# Altium PCB PCB1.PcbDoc
Units mm, origin at the board's own origin, x right, y up, seen from the top; angles counter-clockwise.
Board outline 40 x 40 mm, 4 copper layers (Top Layer, Int1 (GND), Int2 (PWR), Bottom Layer), stack 1.57 mm thick; 33 components, 22 nets, 161 pads, 29 vias.
Unrouted connection lines stored in the file: 88.
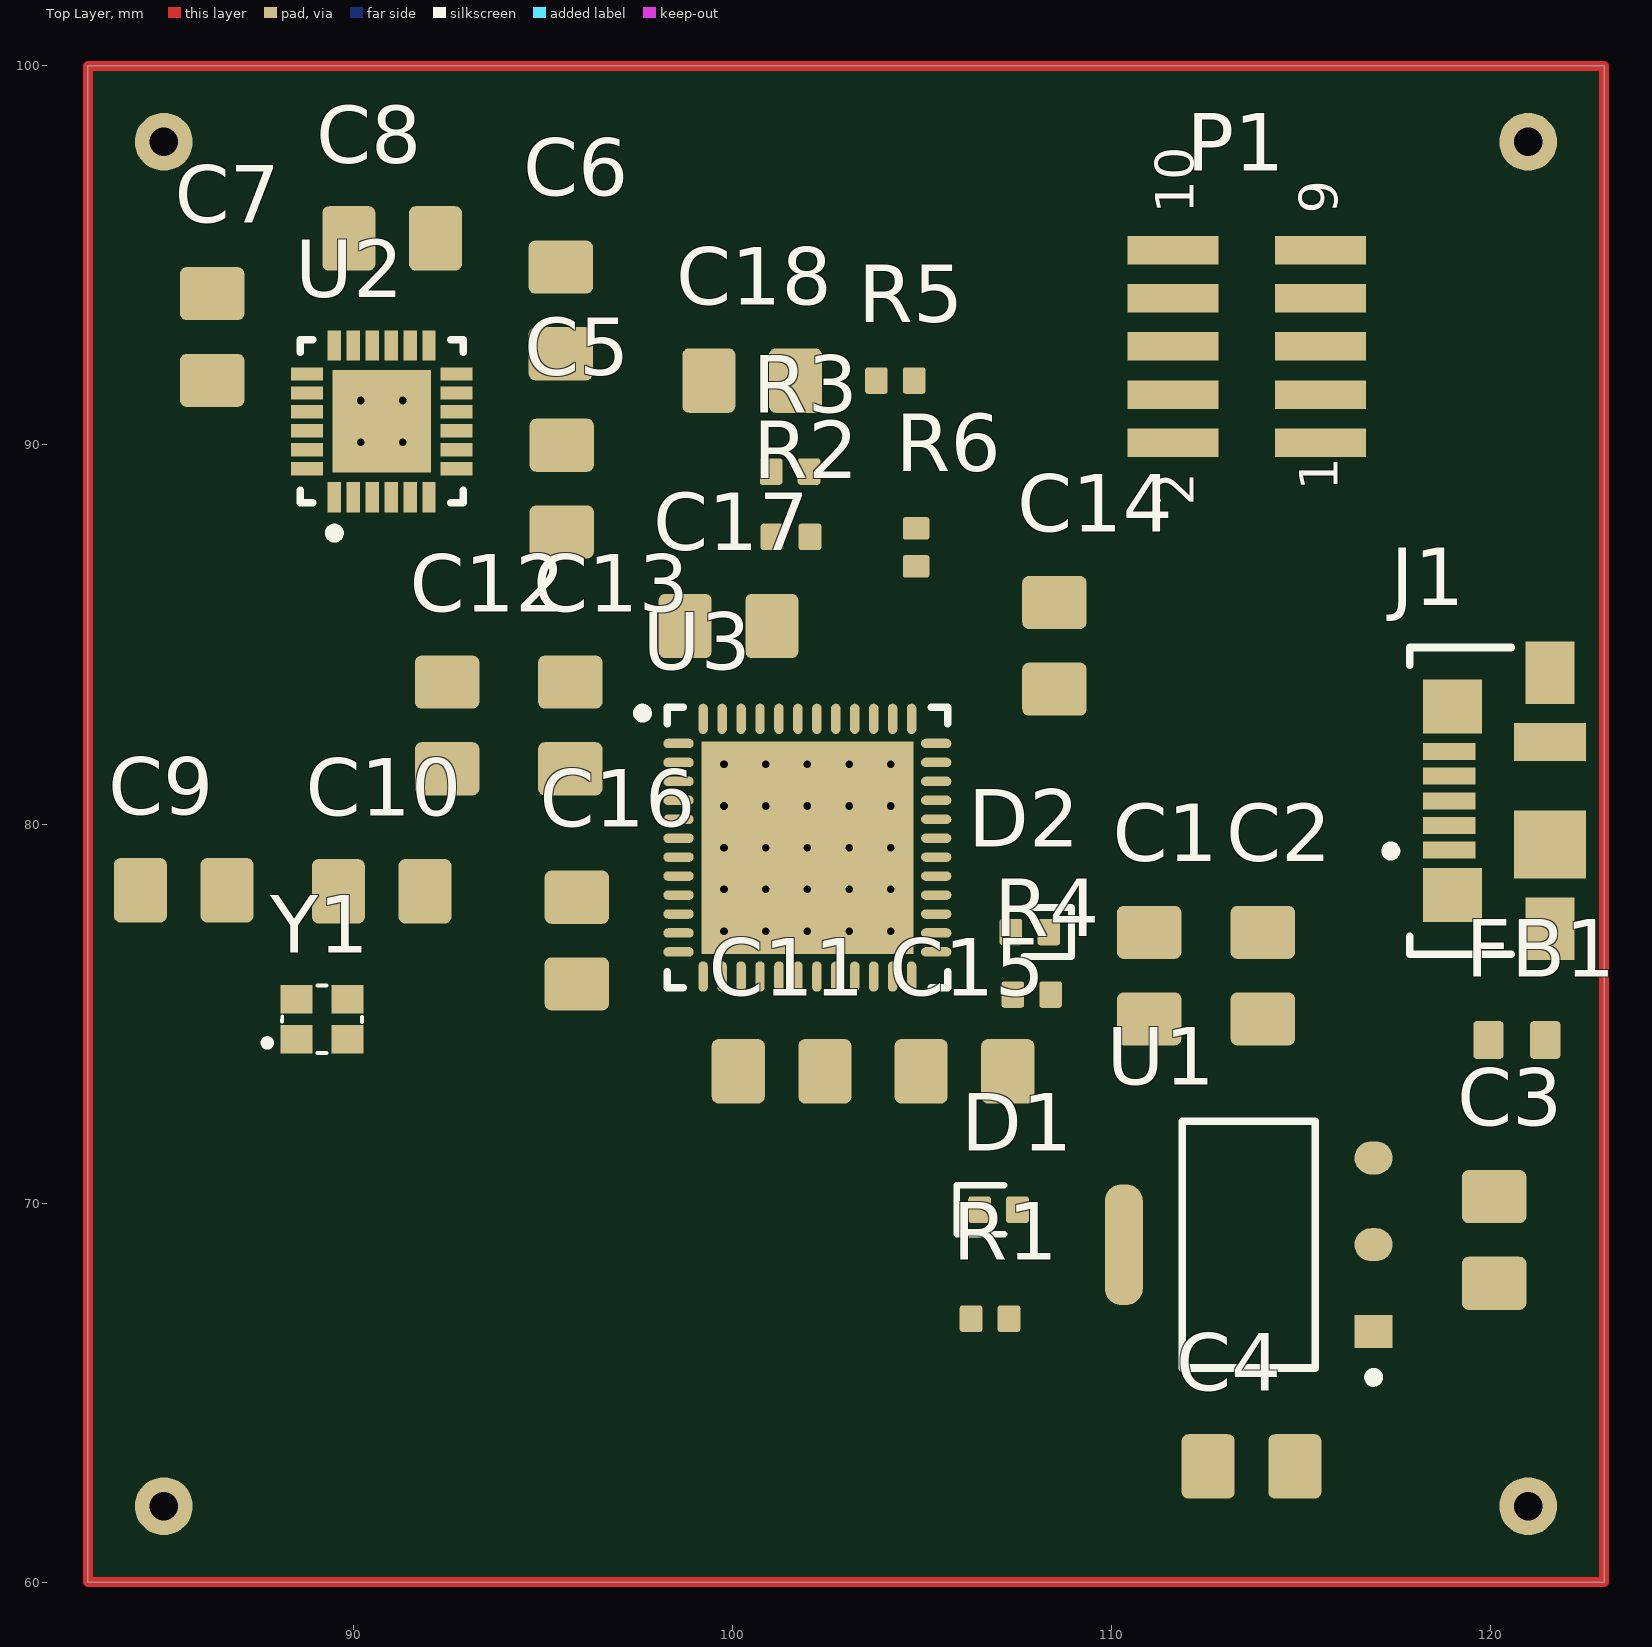
[diagram p0: Top Layer view]
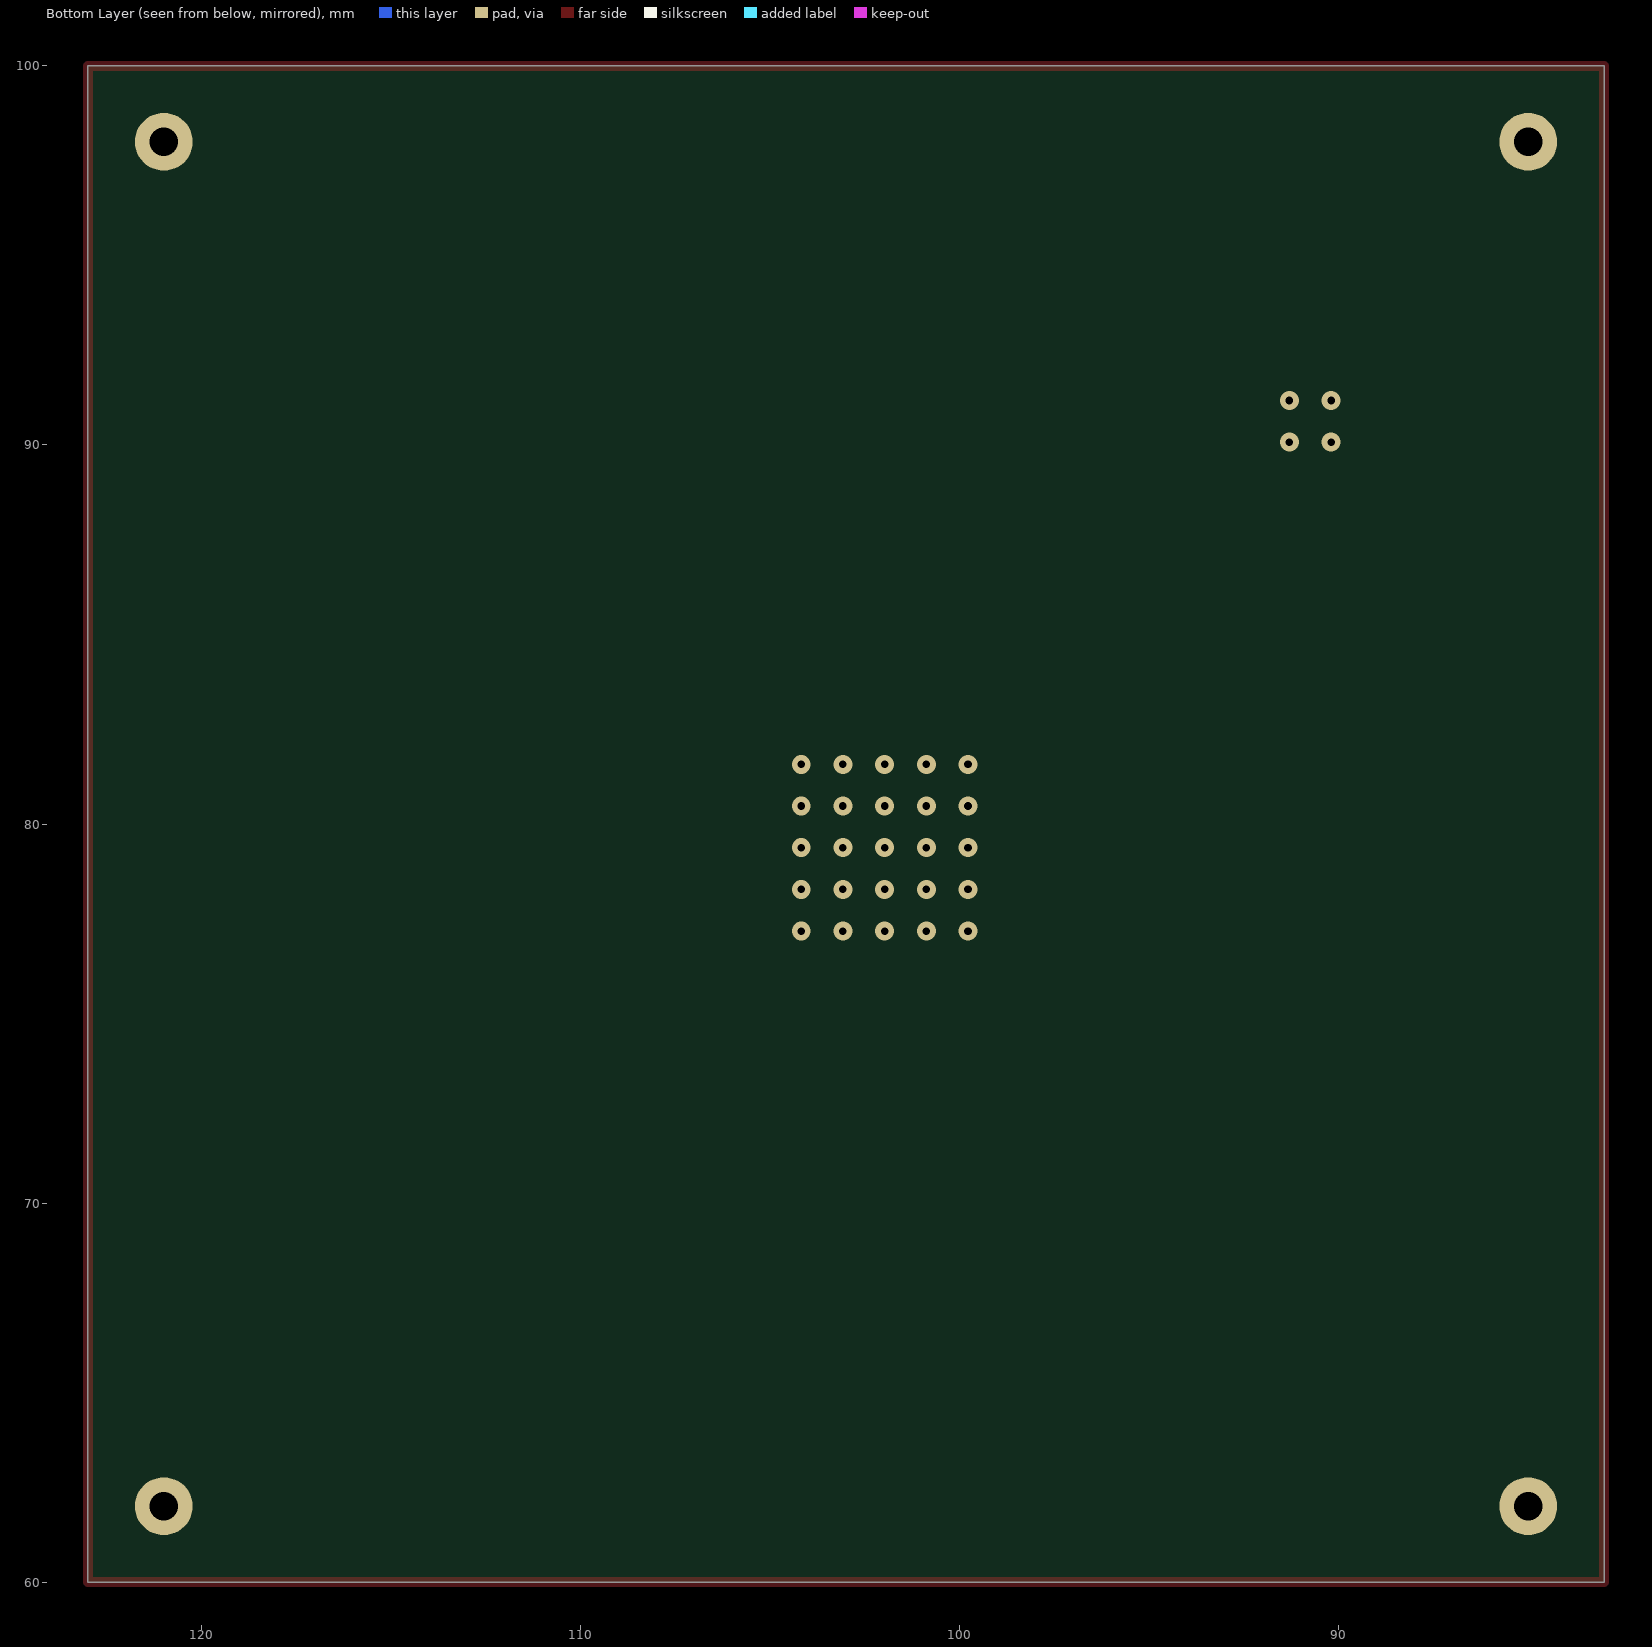
[diagram p1: Bottom Layer view, seen from below]

## Layer stack, top to bottom
Top Solder: solder mask 0.0254, SM-001, Dk 4
Top Layer: signal copper 0.035
Dielectric 1: prepreg 0.2, PP-017, Dk 4.6
Int1 (GND): signal copper 0.0175
Dielectric 3: core 1.065, Core-039, Dk 4.6
Int2 (PWR): signal copper 0.0175
Dielectric 5: prepreg 0.2, PP-017, Dk 4.6
Bottom Layer: signal copper 0.035
Bottom Solder: solder mask 0.0254, SM-001, Dk 4

## Board outline
83,60 123,60 123,100 83,100

## Design rules (kind name [scope] priority, off if disabled: settings)
Clearance [All] p1: gap=0.2 ignorepadtopadclearanceinfootprint=FALSE
DiffPairsRouting [All] p1: maxlimit=0.254 minlimit=0.254 mostfreqgap=0.254 toplayer_minwidth=0.381 toplayer_maxwidth=0.381 toplayer_prefwidth=0.381 midlayer1_minwidth=0.381 midlayer1_maxwidth=0.381 midlayer1_prefwidth=0.381 midlayer2_minwidth=0.381 midlayer2_maxwidth=0.381 midlayer2_prefwidth=0.381 bottomlayer_minwidth=0.381 bottomlayer_maxwidth=0.381 bottomlayer_prefwidth=0.381 maxuncoupledlength=12.7
PolygonConnect [All] p1: connectstyle=Direct reliefconductorwidth=0.254 reliefentries=4 polygonreliefangle="90 Angle" airgapwidth=0.254
RoutingVias [All] p1: holewidth=0.711 width=1.27 viastyle="Through Hole" minholewidth=0.711 minwidth=1.27 maxholewidth=0.711 maxwidth=1.27
SolderMaskExpansion [All] p1: expansion=0.102 istentingtop=FALSE
UnRoutedNet [All] p1: checkbadconnections=TRUE
Width [All] p1: maxlimit=1 minlimit=0.2 preferedwidth=0.3 midlayer1_minwidth=0.254 midlayer1_maxwidth=0.254 midlayer1_prefwidth=0.254 midlayer2_minwidth=0.254 midlayer2_maxwidth=0.254 midlayer2_prefwidth=0.254 minimp=50.000000 maximp=50.000000 favimp=50.000000
28 further rules are at their usual default settings.

## Classes and differential pairs
differential pair class DIFFUSB: DIFFUSB
differential pair DIFFUSB: +DIFFUSB_P -DIFFUSB_N

## Components (designator, comment, footprint, x,y, rotation, side; value= is the part's Value field where it differs from the comment)
C1 "22u" CAP_0805 111,76 r90 top
C2 "22u" CAP_0805 114,76 r90 top
C3 "22u" CAP_0805 120.1,69.025 r90 top
C4 "22u" CAP_0805 113.7,63.05 r180 top
C5 "100nF" CAP_0805 95.5,88.85 r90 top
C6 "10nF" CAP_0805 95.475,93.55 r90 top
C7 "2n2" CAP_0805 86.275,92.85 r270 top
C8 "100nf" CAP_0805 91.025,95.45 r0 top
C9 "10p" CAP_0805 85.525,78.25 r0 top
C10 "10p" CAP_0805 90.75,78.225 r0 top
C11 "2u2" CAP_0805 101.3,73.475 r0 top
C12 "2u2" CAP_0805 92.475,82.6 r90 top
C13 "100n" CAP_0805 95.725,82.6 r90 top
C14 "100n" CAP_0805 108.5,84.7 r90 top
C15 "100n" CAP_0805 106.125,73.475 r0 top
C16 "100n" CAP_0805 95.9,76.925 r270 top
C17 "100n" CAP_0805 99.9,85.225 r0 top
C18 "100n" CAP_0805 100.525,91.7 r0 top
D1 "GREEN" LED_0402_GREEN 107.025,69.825 r180 top
D2 "GREEN" LED_0402_GREEN 107.85,77.15 r0 top
FB1 "FB0603" FB_0603 120.7,74.3 r0 top
J1 "473460001" FP-473460001-MFG 121.225,80.612 r90 top
P1 "62131021021" 62131021021 113.575,92.6 r90 top
R1 "1K" RES_0402 106.8,66.95 r180 top
R2 "2K2" RES_0402 101.55,87.575 r180 top
R3 "2K2" RES_0402 101.525,89.3 r180 top
R4 "1K" RES_0402 107.9,75.5 r180 top
R5 "10K" RES_0402 104.3,91.7 r0 top
R6 "10K" RES_0402 104.85,87.3 r90 top
U1 "ams1117" FP-ams1117-IPC_C 113.625,68.9 r180 top
U2 "MPU-6050" IS-QFN-24_V 90.75,90.625 r90 top
U3 "STM32F411CEU6" STM-UFQFPN48_L 101.981,79.375 r0 top
Y1 "E1SB24E000007E" "TROQ R940000171" 89.175,74.85 r0 top

## Footprints (in the part's own frame and the unit in brackets; to place one, negate y for a bottom-side part, rotate by r counter-clockwise, add the part's x,y. Pads: shape width x height; smd on the part's side, far side on the other; paste and mask are expansions set on the pad)
62131021021 [mm] "Pin Header, pitch 1.27 mm, SMD, Vertical, dual row, 10p"
  rect 0.75x2.4 smd: 1(-2.54,-1.95) 2(-2.54,1.95) 3(-1.27,-1.95) 4(-1.27,1.95) 5(0,-1.95) 6(0,1.95) 7(1.27,-1.95) 8(1.27,1.95) 9(2.54,-1.95) 10(2.54,1.95)
  body extent -3.17,-2.55 3.17,2.55, height 5.9
CAP_0805 [mm]
  rrect25% 1.4x1.7 smd: 1(-1.143,0) 2(1.143,0)
  body extent -1.15,-0.76 1.15,0.79, height 1.01
FB_0603 [mm]
  rrect25% 0.8x1 smd: 1(-0.75,0) 2(0.75,0)
  body extent -0.8,-0.4 0.8,0.4, height 0.81
FP-473460001-MFG [mm]
  rect 0.45x1.38 smd paste+0 mask+0: 1(-1.3,2.31) 2(-0.65,2.31) 3(0,2.31) 4(0.65,2.31) 5(1.3,2.31)
  rect 1.425x1.55 smd paste+0 mask+0: 6(-2.488,2.225) 7(2.488,2.225)
  rect 1.65x1.3 smd paste+0 mask+0: 8(-3.375,-0.35) 11(3.375,-0.35)
  rect 1.8x1.9 smd paste+0 mask+0: 9(-1.15,-0.35)
  rect 1x1.9 smd paste+0 mask+0: 10(1.55,-0.35)
  silkscreen extent -4.05,0.67 4.05,3.97, body extent -4.3,-2.48 4.3,3.45, height 0.25
FP-ams1117-IPC_C [mm]
  rect 1.004x0.872 smd paste+0 mask+0: 1(-3.295,2.29)
  rrect100% 1.004x0.872 smd paste+0 mask+0: 2(-3.295,0) 3(-3.295,-2.29)
  rrect87% 1.004x3.182 smd paste+0 mask+0: 4(3.295,0)
  silkscreen extent -3.42,-3.25 1.75,3.62, body extent -3.9,-3.35 3.9,3.35, height 0.25
IS-QFN-24_V [mm] "QFN, 24-Leads, Body 4x4mm, Pitch 0.5mm, Thermal Pad 2.7x2.6mm"
  rect 0.8x0.35 smd: 1(-2,1.25) 2(-2,0.75) 3(-2,0.25) 4(-2,-0.25) 5(-2,-0.75) 6(-2,-1.25) 13(2,-1.25) 14(2,-0.75) 15(2,-0.25) 16(2,0.25) 17(2,0.75) 18(2,1.25)
  rect 0.35x0.85 smd mask+0.102: 7(-1.25,-1.975) 8(-0.75,-1.975) 9(-0.25,-1.975) 10(0.25,-1.975) 11(0.75,-1.975) 12(1.25,-1.975) 19(1.25,1.975) 20(0.75,1.975) 21(0.25,1.975) 22(-0.25,1.975) 23(-0.75,1.975) 24(-1.25,1.975)
  rect 2.7x2.6 smd: 25(0,0)
  silkscreen extent -3.07,-2.15 2.15,2.15, body extent -2,-2 2,2, height 0.95
LED_0402_GREEN [mm]
  rrect25% 0.6x0.7 smd: A(-0.5,0) K(0.5,0)
  silkscreen extent -0.15,-0.65 1.1,0.65, body extent -0.51,-0.25 0.51,0.25, height 0.45
RES_0402 [mm]
  rrect25% 0.6x0.7 smd: 1(-0.5,0) 2(0.5,0)
  body extent -0.5,-0.25 0.5,0.25, height 0.3
STM-UFQFPN48_L [mm] "QFN, 48-Leads, Body 7.1x7.1mm, Pitch 0.5mm, Thermal Pad 5.6x5.6mm, IPC High Density"
  oval 0.8x0.25 smd: 1(-3.4,2.75) 2(-3.4,2.25) 3(-3.4,1.75) 4(-3.4,1.25) 5(-3.4,0.75) 6(-3.4,0.25) 7(-3.4,-0.25) 8(-3.4,-0.75) 9(-3.4,-1.25) 10(-3.4,-1.75) 11(-3.4,-2.25) 12(-3.4,-2.75) 25(3.4,-2.75) 26(3.4,-2.25) 27(3.4,-1.75) 28(3.4,-1.25) 29(3.4,-0.75) 30(3.4,-0.25) 31(3.4,0.25) 32(3.4,0.75) 33(3.4,1.25) 34(3.4,1.75) 35(3.4,2.25) 36(3.4,2.75)
  oval 0.25x0.8 smd: 13(-2.75,-3.4) 14(-2.25,-3.4) 15(-1.75,-3.4) 16(-1.25,-3.4) 17(-0.75,-3.4) 18(-0.25,-3.4) 19(0.25,-3.4) 20(0.75,-3.4) 21(1.25,-3.4) 22(1.75,-3.4) 23(2.25,-3.4) 24(2.75,-3.4) 37(2.75,3.4) 38(2.25,3.4) 39(1.75,3.4) 40(1.25,3.4) 41(0.75,3.4) 42(0.25,3.4) 43(-0.25,3.4) 44(-0.75,3.4) 45(-1.25,3.4) 46(-1.75,3.4) 47(-2.25,3.4) 48(-2.75,3.4)
  rect 5.6x5.6 smd: 49(0,0)
  silkscreen extent -4.47,-3.7 3.7,3.7, body extent -3.55,-3.55 3.55,3.55, height 0.6
"TROQ R940000171" [mm] "40MHz 9pF ±10ppm SMD2016-4P Crystals ROHS"
  rect 0.85x0.75 smd: 1(-0.675,-0.525) 2(0.675,-0.525) 3(0.675,0.525) 4(-0.675,0.525)
  silkscreen extent -1.49,-0.89 1.05,0.89, body extent -1,-0.8 1,0.8, height 0.5

## Part data
C1 C2 C3 C4 C5 C6 C7 C8 C9 C10 C11 C12 C13 C14 C15 C16 C17 C18: library part CAP_0805, "Capacitor SMD 0805"
D1 D2: library part LED_0402_GREEN, "LED 0402 GREEN SMD"
FB1: library part FB_0603, "Ferrite Bead SMD 0603"
J1: library part CMP-2000-05246-2, "CONN RCPT USB2.0 MICRO B SMD R/A", Current Rating=1.8A, Manufacturer=Molex, Package=0, Temperature="-30°C to +85°C", Temperature Range High=+85°C, Temperature Range Low=-30°C, Voltage Rating=30V, Automotive=No, Category=Conn, ComponentLink2Description=Datasheet, ComponentLink2URL=https://www.molex.com/webdocs/datasheets/pdf/en-us/0473460001_IO_CONNECTORS.pdf, Conn Orientation="Right Angle", Contact Material=Gold,Nickel, Device Class L1=Connectors, Device Class L2="USB Connectors", Device Class L3=unset, Digikey Description="CONN RCPT USB2.0 MICRO B SMD R/A", Footprint Url=https://www.molex.com/pdm_docs/sd/473460001_sd.pdf, Height=2.945mm, Is Female=yes, Lead Free=Yes, Manufacturer Part Number=473460001, Number Of Contacts=5, Octopart=https://octopart.com/47346-0001-molex-7164928, Pitch=0.65mm, RoHS=TRUE, Shielding=true, Usb Standard="USB 2.0"
P1: library part CMP-1502-00938-3, Current Rating=1A, Max Operating Temperature=105°C, Min Operating Temperature=-40°C, Voltage Rating=100V, Contact Material=Gold, NexarPartId=107344426, Number Of Contacts=10, Number of Rows=2
R1 R2 R3 R4 R5 R6: library part RES_0402, "Resistor SMD 0402"
U1: library part CMP-209535-000002-1, "1A LOW DROPOUT VOLTAGE REGULATOR", RoHS Compliant=Yes
U2: library part CMP-1753-00002-2, "3-Axis Gyroscope, Accelerometer and a Digital Motion Processor(TM) (DMP), 2.375 to 3.46 V, -40 to 85 degC, 24-Pin QFN, RoHS, Tape and Reel", Manufacturer=InvenSense, Standard Package=5,000, Category=Sensors,Transducers, Datasheet URL=http://datasheet.octopart.com/MPU-6050-InvenSense-datasheet-14421344.pdf, Datasheet Version="Rev. 3.3, 05/2012", Dynamic Catalog=MPU-6000™Series, Family=Multifunction, Featured Product=MPU-60506-Axis,IntegratedI²CSolution, Manufacturer URL=http://www.invensense.com/, Online Catalog=MPU-6000™Series, Other Names="1428-1007-2 / MPU6050", Output Type=Digital, Sensor Type=MotionTracking, Unit PriceUSD=Digital
U3: library part CMP-0243-00165-1, "ARM Cortex-M4 32-bit MCU+FPU, 512 KB Flash, 128 KB RAM, 36 I/Os, 48-Pin UFQFPN, -40 to 85 degC, Tray", I/Os (High Current)=36, Operating Frequency(F) (Processor speed) (MHz)=100, Package Description=UFQFPN48, Package Reference="48-Pin Ultra Thin Fine Pitch Quad Flat No-Lead, 7 x 7 x 0.6 mm Body, 0.5 mm Pitch, Exposed Pad", Supply Voltage(Vcc) min (V)=1.7, ComponentLink1Description="Manufacturer URL", ComponentLink1URL=http://www.st.com/, ComponentLink2Description=Datasheet, ComponentLink2URL=http://www.st.com/st-web-ui/static/active/en/resource/technical/document/datasheet/DM00115249.pdf, Core="ARM Cortex-M4", DatasheetVersion="Rev. 6", FLASH Size (Prog) (kB)=512, Internal RAM Size (kB)=128, Mounting Technology="Surface Mount", Packing=Tray
Y1: "24MHz 9pF ±10ppm SMD2016-4P Crystals ROHS"

## Free pads (board coordinates)
  round 1.524 hole 0.762: 1(85,98) 2(121,98) 3(85,62) 4(121,62)

## Via types
v1: diameter 0.5, hole 0.2, Top Layer to Bottom Layer, 29 vias

## Nets (pads, with @x,y where several pads share a name; then routed paths per layer and width w, separated by ;. In a path a pad name is that pad's centre, name@x,y a point inside that pad or via, vN(x,y) a via of type N, cw(c..) or ccw(c..) an arc to the next point about the centre after c; other vN are vias at no path point)
+3V3: C4.2 C6.2 C8.2 C12.2 C13.2 C14.2 C15.2 C16.2 C17.2 D1.A P1.1 R2.2 R3.2 R5.1 U1.2 U1.4 U2.8 U2.13 U3.1 U3.9 U3.24 U3.36 U3.48
+5: C2.2 C3.2 FB1.2 U1.3
DIFFUSB_N: J1.2 U3.32
DIFFUSB_P: J1.3 U3.33
GND: C1.1 C2.1 C3.1 C4.1 C5.1 C6.1 C7.1 C8.1 C9.1 C10.1 C11.1 C12.1 C13.1 C14.1 C15.1 C16.1 C17.1 C18.1 J1.5 P1.3 P1.5 P1.9 R1.1 R4.1 R6.2 U1.1 U2.1 U2.9 U2.11 U2.18 U2.25 U3.8 U3.23 U3.35 U3.47 U3.49 Y1.2 Y1.4
  other v1: 99.781,77.175 100.881,77.175 101.981,77.175 103.081,77.175 104.181,77.175 99.781,78.275 100.881,78.275 101.981,78.275 103.081,78.275 104.181,78.275 99.781,79.375 100.881,79.375 101.981,79.375 103.081,79.375 104.181,79.375 99.781,80.475 100.881,80.475 101.981,80.475 103.081,80.475 104.181,80.475 99.781,81.575 100.881,81.575 101.981,81.575 103.081,81.575 104.181,81.575 90.2,90.075 91.3,90.075 90.2,91.175 91.3,91.175
"IMU REGOUT": C5.2 U2.10
IMU_INT: U2.12 U3.45
IMU_SCL: R2.1 U2.23 U3.42
IMU_SDA: R3.1 U2.24 U3.43
LED_PWR_KATHODE: D1.K R1.2
"MCU BOOT0": R6.1 U3.44
"MCU VCAP1": C11.2 U3.22
MCU_LED_A: D2.A U3.26
MCU_LED_K: D2.K R4.2
MCU_NRST: C18.2 P1.10 R5.2 U3.7
MCU_OSC_IN: C9.2 U3.5 Y1.1
MCU_OSC_OUT: C10.2 U3.6 Y1.3
MCU_SWCLK: P1.4 U3.37
MCU_SWDIO: P1.2 U3.34
MCU_SWO: P1.6 U3.39
NetC7_2: C7.2 U2.20
VBUS: C1.2 FB1.1 J1.1
pads on no net: J1.4 J1.6 J1.7 J1.8 J1.9 J1.10 J1.11 P1.7 P1.8 U2.2 U2.3 U2.4 U2.5 U2.6 U2.7 U2.14 U2.15 U2.16 U2.17 U2.19 U2.21 U2.22 U3.2 U3.3 U3.4 U3.10 U3.11 U3.12 U3.13 U3.14 U3.15 U3.16 U3.17 U3.18 U3.19 U3.20 U3.21 U3.25 U3.27 U3.28 U3.29 U3.30 U3.31 U3.38 U3.40 U3.41 U3.46
copper on no net: | length 160
  Top Layer w0.254: 83,60 83,100 123,100 123,60 83,60

## Text inside footprints (layer, text, board x,y; h text height)
D1: Top 3D Body "+" at 108.908,69.317 h0.5 r180
D2: Top 3D Body "+" at 105.967,77.658 h0.5
P1: Top Overlay "2" at 112.175,88.395 h1.02 r90; Top Overlay "1" at 115.975,88.795 h1.02 r90; Top Overlay "9" at 115.975,96.105 h1.02 r90; Top Overlay "10" at 112.175,96.105 h1.02 r90